# Altium PCB Back.PcbDoc
Units mm, origin at the board's own origin, x right, y up, seen from the top; angles counter-clockwise.
Board outline 72.04 x 19.15 mm, 2 copper layers (Top Layer, Bottom Layer), stack 1.071 mm thick; 9 components, 7 nets, 31 pads, 3 vias.
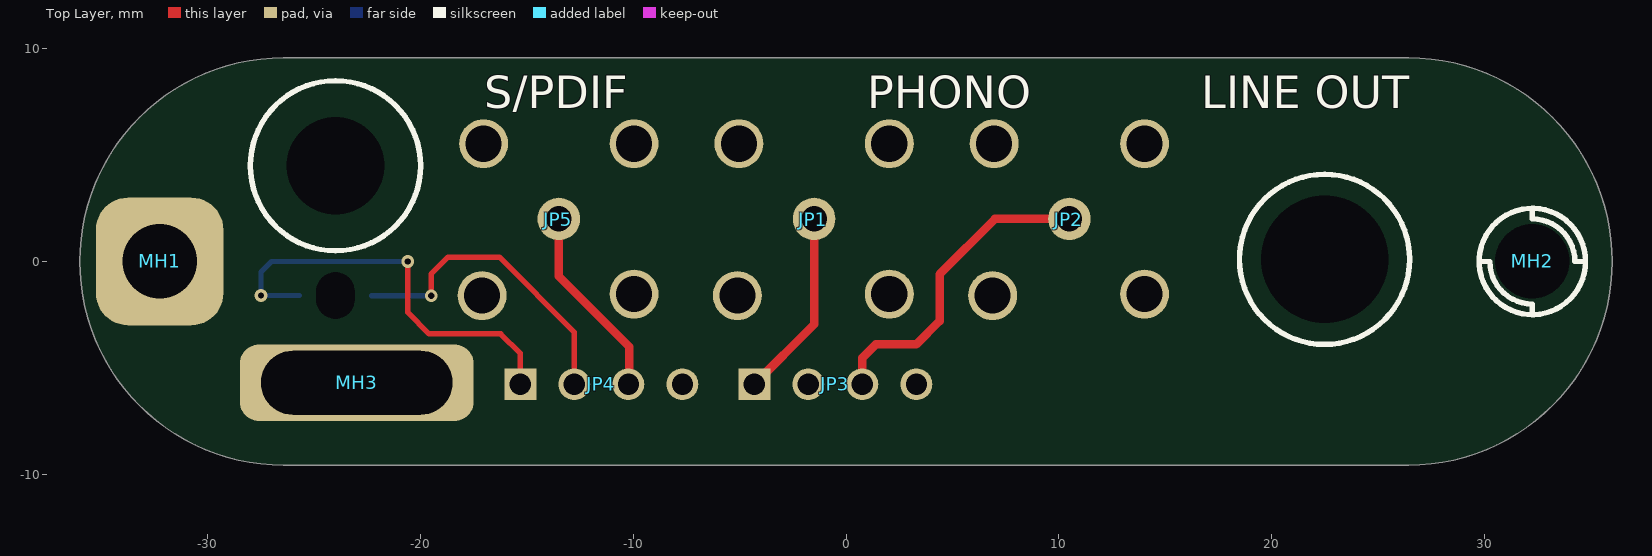
[diagram p0: Top Layer view]
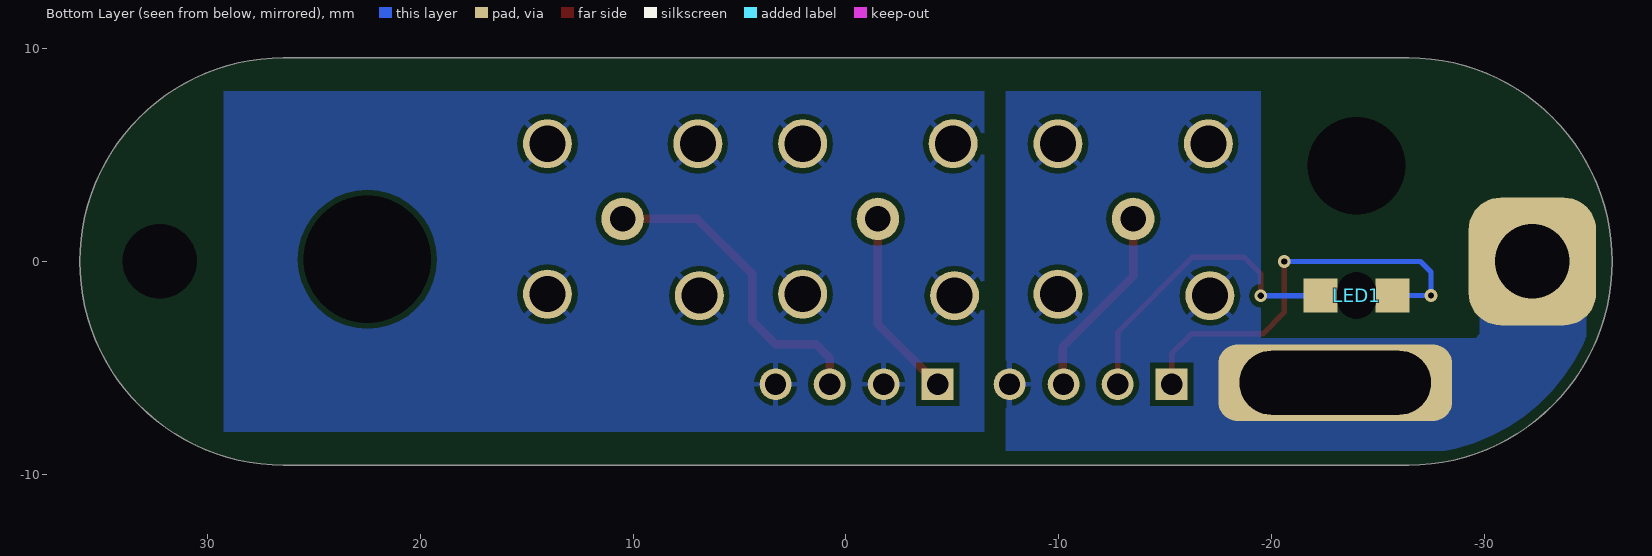
[diagram p1: Bottom Layer view, seen from below]
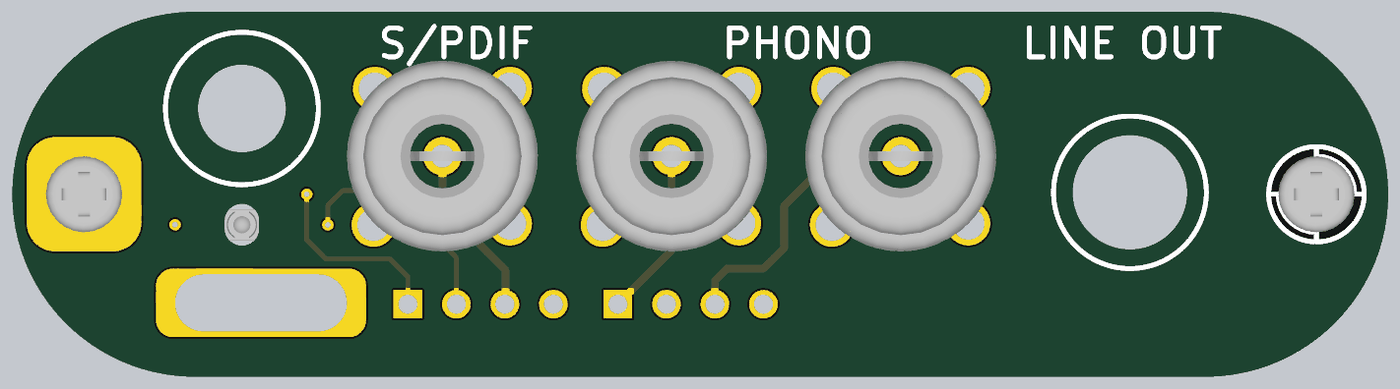
[diagram p2: 3D render of the assembled board from above, using the file's embedded part models]

## Layer stack, top to bottom
Top Solder: solder mask 0.0102, Solder Resist, Dk 3.5
Top Layer: signal copper 0.0356
Dielectric 1: dielectric 1, FR-4, Dk 4.8
Bottom Layer: signal copper 0.0356
Bottom Solder: solder mask 0.0102, Solder Resist, Dk 3.5

## Board outline
-26.445,-9.575 26.445,-9.575 ccw(c26.445,0) 26.445,9.575 -26.445,9.575 ccw(c-26.445,0)

## Design rules (kind name [scope] priority, off if disabled: settings)
BoardOutlineClearance [All] p1: gap=0.5 ignorepadtopadclearanceinfootprint=FALSE
Clearance [All] p1: gap=0.254 ignorepadtopadclearanceinfootprint=FALSE except(0: Arc-Hole Track-Hole SMDPad-Hole THPad-Hole Via-Hole Fill-Hole Poly-Hole Region-Hole Text-Hole)
HoleSize [All] p1: absolutevalues=TRUE maxlimit=10 minlimit=0.3 maxpercent=80.000 minpercent=20.000
PolygonConnect PolygonConnect_GND [InNet('GND') vs HasFootprint('MECH_MHOLE_3.5-GND')] p1: connectstyle=Direct reliefconductorwidth=0.254 reliefentries=4 polygonreliefangle="90 Angle" airgapwidth=0.254
PolygonConnect PolygonConnect_GND_1 [InNet('GND') vs HasFootprint('MECH_USB_MICRO_CUTOUT')] p2: connectstyle=Direct reliefconductorwidth=0.254 reliefentries=4 polygonreliefangle="90 Angle" airgapwidth=0.254
PolygonConnect [All] p3: thpad.connectstyle=Relief thpad.reliefconductorwidth=0.254 thpad.reliefentries=4 thpad.polygonreliefangle="90 Angle" thpad.airgapwidth=0.254 smdpad.connectstyle=Direct smdpad.reliefconductorwidth=0.254 smdpad.reliefentries=4 smdpad.polygonreliefangle="90 Angle" smdpad.airgapwidth=0.254 via.connectstyle=Relief via.reliefconductorwidth=0.254 via.reliefentries=4 via.polygonreliefangle="90 Angle" via.airgapwidth=0.254
RoutingVias [All] p1: holewidth=0.711 width=1.27 viastyle="Through Hole" minholewidth=0.711 minwidth=1.27 maxholewidth=0.711 maxwidth=1.27
SilkToSolderMaskClearance [IsPad] p1: minsilkscreentomaskgap=0 clearancetoexposedcopper=TRUE
SolderMaskExpansion [All] p1: expansion=0.102
Width [All] p1: maxlimit=1 minlimit=0.254 preferedwidth=0.254
28 further rules are at their usual default settings.

## Components (designator, comment, footprint, x,y, rotation, side; value= is the part's Value field where it differs from the comment)
JP1 "RCA RED" CONN_RCA-Lumberg-BTOR -1.5,2 r45 top value=RED
JP2 "RCA BLACK" CONN_RCA-Lumberg-BTOR 10.5,2 r45 top value=BLACK
JP3 "CONN_1x4" CONN_HDR1X4-No3D -0.5,-5.77 r0 top
JP4 "CONN_1x4" CONN_HDR1X4-No3D -11.5,-5.77 r0 top
JP5 "RCA RED" CONN_RCA-Lumberg-BTOR -13.5,2 r45 top value=RED
LED1 "BLUE" LED-KPTL-3216QBC -24,-1.6 r180 bottom
MH1 "Mounting hole" MECH_MHOLE_3.5-GND -32.265,0 r0 top
MH2 "Mounting hole" MECH_MHOLE_3.5 32.265,0 r0 top
MH3 "Mounting hole" MECH_USB_MICRO_CUTOUT -22.9,-4.225 r180 top

## Footprints (in the part's own frame and the unit in brackets; to place one, negate y for a bottom-side part, rotate by r counter-clockwise, add the part's x,y. Pads: shape width x height; smd on the part's side, far side on the other; paste and mask are expansions set on the pad)
CONN_HDR1X4-No3D [mm] "Connector; Header; 4 Position"
  rect 1.5x1.5 hole 1: 1(-3.81,0)
  round 1.5 hole 1: 2(-1.27,0) 3(1.27,0) 4(3.81,0)
CONN_RCA-Lumberg-BTOR [mm] "BTOR 1"
  round 2 hole 1.2: 1(0,0)
  round 2.3 hole 1.7: 2(-5.1,0) 2(0,5) 2(0,-5) 2(5,0)
  body extent -5,-5 5,5, height 17.01
LED-KPTL-3216QBC [mm] "Reverse"
  rrect50% 0x0 hole 1.8 slot 2.2 at 90 deg unplated: 0(0,0)
  rect 1.6x1.6 smd: A(1.7,0) K(-1.7,0)
  body extent -1.6,-0.8 1.6,0.8, height 0.31
MECH_MHOLE_3.5 [mm] "Mounting hole 3.5mm"
  round 0 hole 3.5 unplated mask+2.5: 0(0,0)
  silkscreen extent -2.5,-2.5 2.5,2.5, body extent -2,-2 2,2, height 1.61
MECH_MHOLE_3.5-GND [mm] "Mounting hole 3.5mm"
  rrect50% 6x6 hole 3.5: 0(0,0)
  body extent -2,-2 2,2, height 1.61
MECH_USB_MICRO_CUTOUT [mm] "Molex"
  rrect50% 11x3.6 hole 3 slot 9 at 0 deg: 0(0.1,1.475)

## Part data
JP1 JP5: library part CONN_RCA_LUMBERG_BTOR_1_RED, "RCA panel-mount socket red, 1553 02 rot, Lumberg Connect GmbH", MPN="BTOR 1 ROT", ELFA=300-68-470, Farnell=1368644
JP2: library part CONN_RCA_LUMBERG_BTOR_1_BLACK, "RCA panel-mount socket red, 1553 02 rot, Lumberg Connect GmbH", MPN="BTOR 1 SCHWARZ", ELFA=300-68-471, Farnell=1217030
JP3 JP4: library part CONN_MHDR_1x4, "Header, 4-Pin", MPN=0470531000, DigiKey=WM4330-ND, LatestRevisionDate=17-Jul-2002, LatestRevisionNote="Re-released for DXP Platform.", Publisher="Altium Limited"
LED1: library part LED-BLUE-KPTL-3216QBC-D-01, "LED BLUE", MPN=KPTL-3216QBC-D-01, Farnell=2217907, VF=3.3V
MH1 MH2: library part MECH_MHOLE
MH3: library part MECH_MICRO_B_CUTOUT

## Free pads (board coordinates)
  rect 1.8x1.05 hole 4.6 unplated: 0(-24,4.5)
  rect 0x0 hole 6 unplated: 0(22.5,0.1)

## Via types
v1: diameter 0.6, hole 0.3, Top Layer to Bottom Layer, 3 vias

## Nets (pads, with @x,y where several pads share a name; then routed paths per layer and width w, separated by ;. In a path a pad name is that pad's centre, name@x,y a point inside that pad or via, vN(x,y) a via of type N, cw(c..) or ccw(c..) an arc to the next point about the centre after c; other vN are vias at no path point)
GND: JP4.4 JP5.2 MH1.0 MH3.0
GNDA: JP1.2 JP2.2 JP3.2 JP3.4
LEFT: JP1.1 JP3.1 | length 8.9
  Top Layer w0.4: JP3.1 -1.5,-2.96 JP1.1
NetJP4_2: JP4.2 LED1.K | length 15.1
  Top Layer w0.254: v1(-19.5,-1.606) -19.5,-0.6 -18.7,0.2 -16.3,0.2 -12.77,-3.33 JP4.2 JP4.2@-12.77,-6.145
  Bottom Layer w0.254: LED1.K -22.294,-1.606 v1(-19.5,-1.606)
NetJP4_3: JP4.3 JP5.1 | length 9.5
  Top Layer w0.4: JP5.1 -13.5,-0.7 -10.2,-4 -10.2,-5.74 JP4.3 JP4.3@-10.23,-6.145
RIGHT: JP2.1 JP3.3 | length 15
  Top Layer w0.4: JP3.3 0.77,-4.53 1.4,-3.9 3.3,-3.9 4.4,-2.8 4.4,-0.6 7,2 JP2.1
VBUS: JP4.1 LED1.A | length 19.9
  Top Layer w0.254: v1(-20.6,0) -20.6,-2.4 -19.6,-3.4 -16.233,-3.4 -15.31,-4.323 JP4.1
  Bottom Layer w0.254: LED1.A v1(-27.5,-1.6) -27.5,-0.5 -27,0 v1(-20.6,0)
pads on no net: LED1.0 MH2.0

## Polygon pours and split planes (outlines as drawn)
GND on Bottom Layer "Bottom Layer-GND" (solid, pour order 3): -34.8,2.5 -34.8,-8.9 -13.827,-8.9 -13.827,-3.6 -29.6,-3.6 -29.8,-3.4 -29.8,2.5
GNDA on Bottom Layer "GND" (solid, remove dead copper, pour order 0): -6.501,8 -6.501,-8 29.25,-8 29.25,8
GND on Bottom Layer "GND" (solid, remove dead copper, pour order 2): -19.5,8 -19.5,-8.9 -7.5,-8.9 -7.5,8

## Silkscreen, mask and mechanical layers (free items; w line width, h text height)
Top Overlay:
  circle w0.254: c-24,4.5 r4
  circle w0.254: c22.5,0.1 r4
  text "S/PDIF" at -17,7.2 h1.52
  text "PHONO" at 1,7.2 h1.52
  text "LINE OUT" at 16.7,7.2 h1.52
Mechanical 1:
  the board outline again, w0.2